# Altium PCB 海关全向电源指示灯板V2.PcbDoc
Units mm, origin at the board's own origin, x right, y up, seen from the top; angles counter-clockwise.
Board outline 26 x 10 mm, 2 copper layers (Top Layer, Bottom Layer); 5 components, 8 nets, 18 pads, 0 vias.
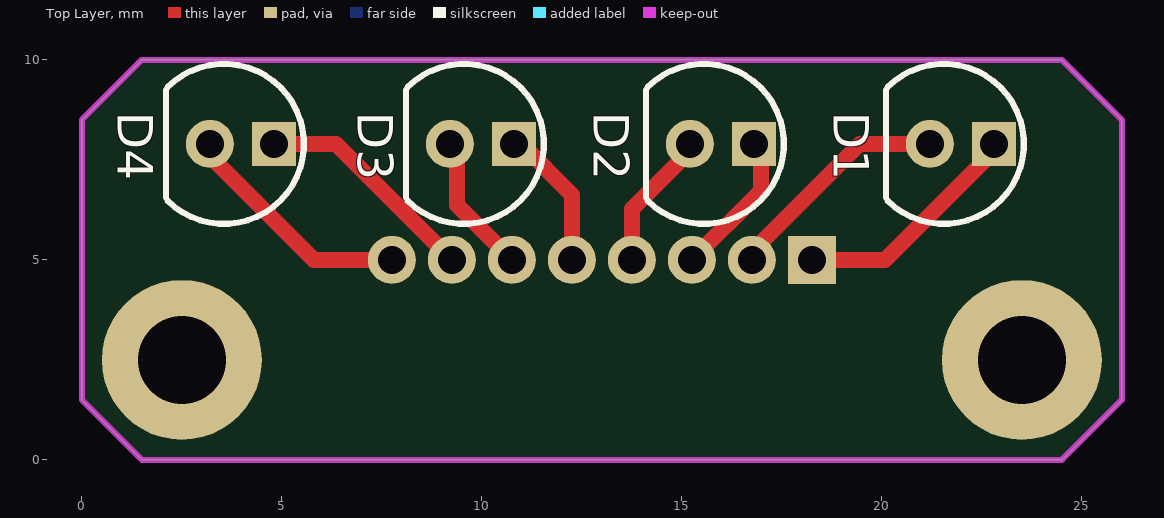
[diagram p0: Top Layer view]
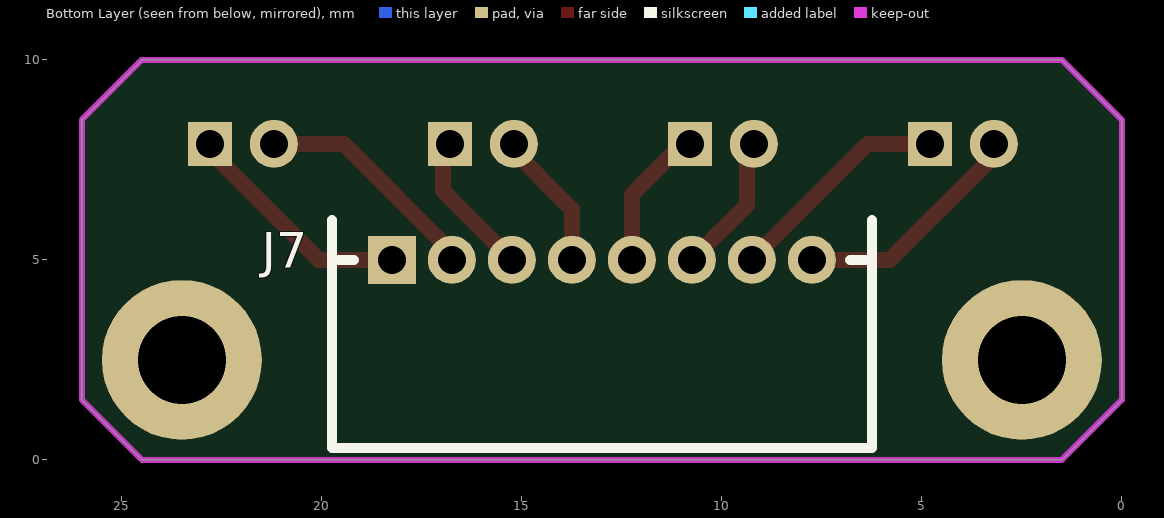
[diagram p1: Bottom Layer view, seen from below]
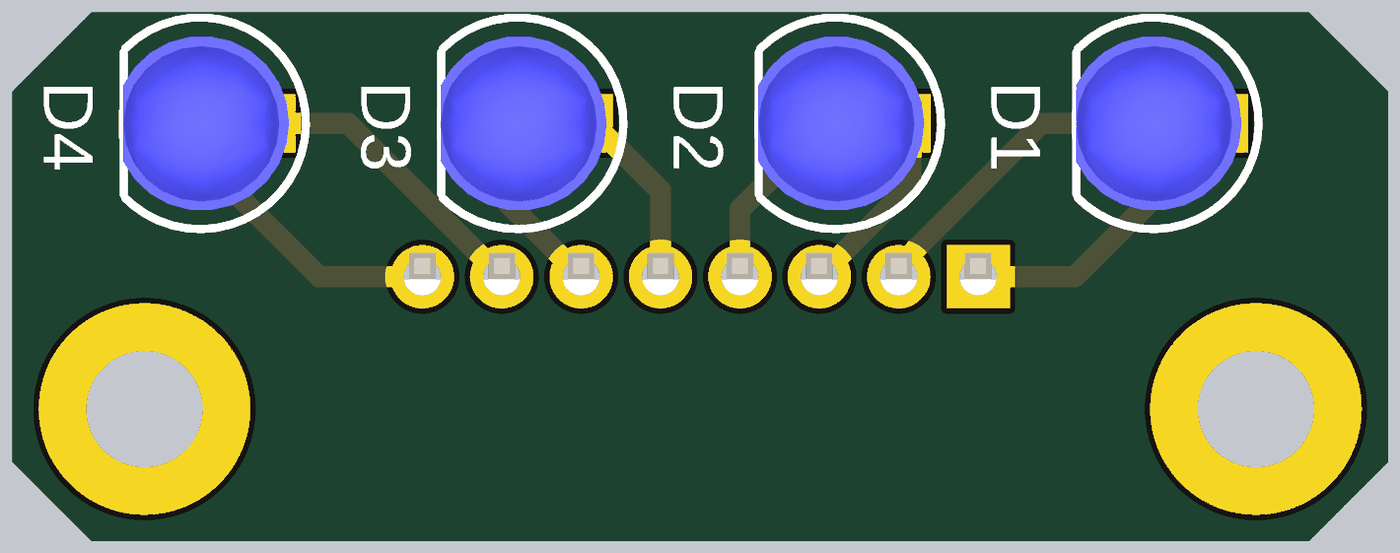
[diagram p2: 3D render of the assembled board from above, using the file's embedded part models]

## Layer stack, top to bottom
Top Solder: solder mask 0.0102, Solder Resist, Dk 3.5
Top Layer: signal copper 0.0356
Dielectric 1: dielectric 0.32, FR-4, Dk 4.8
Bottom Layer: signal copper 0.0356
Bottom Solder: solder mask 0.0102, Solder Resist, Dk 3.5

## Board outline
0,1.5 1.5,0 24.5,0 26,1.5 26,8.5 24.5,10 1.5,10 0,8.5

## Design rules (kind name [scope] priority, off if disabled: settings)
Clearance [All] p1: gap=0.152
ComponentClearance [All] p1: gap=0 collisioncheckmode=3 verticalgap=0 showdistances=FALSE
Height [All] p1: minheight=0 maxheight=50.8 prefheight=12.7
HoleSize [All] p1: absolutevalues=TRUE maxlimit=5.08 minlimit=0.025 maxpercent=80.000 minpercent=20.000
HoleToHoleClearance [All] p1: gap=0.152 allowstackedmicrovias=TRUE
MinimumSolderMaskSliver [All] p1: minsoldermaskwidth=0
PlaneConnect [All] p1: planeconnectstyle=Direct reliefexpansion=0.508 reliefentries=4 reliefconductorwidth=0.254 reliefairgap=0.254
PolygonConnect [All] p1: connectstyle=Direct reliefconductorwidth=0.254 reliefentries=4 polygonreliefangle="90 Angle" airgapwidth=0.254
RoutingVias [All] p1: holewidth=0.711 width=1.27 viastyle="Through Hole" minholewidth=0.203 minwidth=0.305 maxholewidth=5.08 maxwidth=7.62
SilkToSilkClearance [All] p1: silktosilkclearance=0
SilkToSolderMaskClearance [IsPad] p1: minsilkscreentomaskgap=0 clearancetoexposedcopper=TRUE
SolderMaskExpansion [All] p1: expansion=0.102
Width [All] p1: maxlimit=4 minlimit=0.254 preferedwidth=0.254
21 further rules are at their usual default settings.

## Components (designator, comment, footprint, x,y, rotation, side; value= is the part's Value field where it differs from the comment)
D1 "Led" LED-D3 22,7.9 r180 top
D2 "Led" LED-D3 16,7.9 r180 top
D3 "Led" LED-D3 10,7.9 r180 top
D4 "Led" LED-D3 4,7.9 r180 top
J7 "Jack 1x8" ZH-8AWD 13,5 r180 bottom

## Footprints (in the part's own frame and the unit in brackets; to place one, negate y for a bottom-side part, rotate by r counter-clockwise, add the part's x,y. Pads: shape width x height; smd on the part's side, far side on the other; paste and mask are expansions set on the pad)
LED-D3 [mm]
  rect 1.1x1.1 hole 0.7: 1(-0.8,0)
  round 1.2 hole 0.7: 2(0.8,0)
  silkscreen extent -1.55,-2 1.89,2, body extent -1.23,-1.65 1.98,1.65, height 4.98
ZH-8AWD [mm] "1.5mm，8P，卧插"
  rect 1.2x1.2 hole 0.7: 1(-5.25,0)
  round 1.2 hole 0.7: 2(-3.75,0) 3(-2.25,0) 4(-0.75,0) 5(0.75,0) 6(2.25,0) 7(3.75,0) 8(5.25,0)
  silkscreen extent -6.75,-4.7 6.75,1, body extent -6.75,-4.75 6.75,0.95, height 3.95

## Part data
D1 D2 D3 D4: "light emitted diode"
J7: "插座"

## Free pads (board coordinates)
  round 4 hole 2.2: ""(2.5,2.5) ""(23.5,2.5)

## Nets (pads, with @x,y where several pads share a name; then routed paths per layer and width w, separated by ;. In a path a pad name is that pad's centre, name@x,y a point inside that pad or via, vN(x,y) a via of type N, cw(c..) or ccw(c..) an arc to the next point about the centre after c; other vN are vias at no path point)
NetD1_1: D1.1 J7.1 | length 5.9
  Top Layer w0.4: J7.1 20.078,5 D1.1@22.978,7.9
NetD1_2: D1.2 J7.2 | length 5.9
  Top Layer w0.4: J7.2 16.75,5.198 19.452,7.9 D1.2@21.378,7.9
NetD2_1: D2.1 J7.3 | length 3.6
  Top Layer w0.4: J7.3 16.978,6.728 D2.1@16.978,7.9
NetD2_2: D2.2 J7.4 | length 3.6
  Top Layer w0.4: J7.4 13.75,6.272 D2.2@15.378,7.9
NetD3_1: D3.1 J7.5 | length 3.4
  Top Layer w0.4: D3.1@10.978,7.9 12.25,6.628 J7.5
NetD3_2: D3.2 J7.6 | length 3.5
  Top Layer w0.4: D3.2@9.378,7.9 9.378,6.372 J7.6
NetD4_1: D4.1 J7.7 | length 5.7
  Top Layer w0.4: D4.1 6.35,7.9 J7.7
NetD4_2: D4.2 J7.8 | length 5.9
  Top Layer w0.4: D4.2@3.378,7.9 3.378,7.422 5.8,5 J7.8

## Keep-outs
Keep-Out Layer:
  the board outline again, w0.152